# EAGLE board Line follower bot(Tinker CAD) (EAGLE 9.7.0)

Size 232.99 x 148.3 mm. Coordinates in mm from the lower left corner, seen from the top.
Outline: 0,0 232.99,0 232.99,148.3 0,148.3 0,0
Copper layers (1*16): Top 0.035mm / dielectric 1.5mm / Bottom 0.035mm
Design rules "default": minimum track width 6mil, minimum drill 0.35mm, track to track 6mil, track to pad 6mil, pad to pad 6mil, via to via 6mil, smd to smd 6mil, copper to edge 40mil, drill to drill 6mil, minimum pad ring 10mil, minimum via ring 8mil, stop-mask expansion 4mil, vias tented up to drill 0mil, thermal gap 10mil

## Footprints (pad centres in the part's own frame; a part is rotated, then mirrored left to right if it is on the bottom)
BATTERY-GENERIC = drill 1.118 pad 3.15 octagon: + 2.54,0; - -2.54,0
MOTOR = drill 1.118 pad 3.15 octagon: + 2.54,0; - -2.54,0
ARDUINO-UNO-R3-SHIELD = drill 1.016 pad 1.88: 3.3V 24.13,-2.54; 5V 24.13,0; A0 24.13,12.7; A1 24.13,15.24; A2 24.13,17.78; A3 24.13,20.32; A4 24.13,22.86; A5 24.13,25.4; AREF -24.13,-13.97; D2 -24.13,20.32; D3 -24.13,17.78; D4 -24.13,15.24; D5 -24.13,12.7; D6 -24.13,10.16; D7 -24.13,7.62; D8 -24.13,3.81; D9 -24.13,1.27; D10 -24.13,-1.27; D11 -24.13,-3.81; D12 -24.13,-6.35; D13 -24.13,-8.89; GND@0 24.13,2.54; GND@1 24.13,5.08; GND@2 -24.13,-11.43; IOREF 24.13,-7.62; NC 24.13,-10.16; RES 24.13,-5.08; RX -24.13,25.4; SCL -24.13,-19.05; SDA -24.13,-16.51; TX -24.13,22.86; VIN 24.13,7.62
TSOP48 = drill 0.8: 1 -2.54,0; 2 0,0; 3 2.54,0
DIP762W53P254L1969H508Q16B = drill 0.743 pad 1.343: 1 -3.81,8.89; 2 -3.81,6.35; 3 -3.81,3.81; 4 -3.81,1.27; 5 -3.81,-1.27; 6 -3.81,-3.81; 7 -3.81,-6.35; 8 -3.81,-8.89; 9 3.81,-8.89; 10 3.81,-6.35; 11 3.81,-3.81; 12 3.81,-1.27; 13 3.81,1.27; 14 3.81,3.81; 15 3.81,6.35; 16 3.81,8.89

## Placement (x,y rotation side)
BAT1  9V  [BATTERY-GENERIC]  129.29,8.26 270 top
M1  MOTOR_HDR  [MOTOR]  224.73,140.04 0 top
M2  MOTOR_HDR  [MOTOR]  185.32,139.53 0 top
U1  ARDUINO-UNO-R3-SHIELD  [ARDUINO-UNO-R3-SHIELD]  47.88,113.97 270 top
U4  IR-RECEIVERTSOP48  [TSOP48]  36.46,66.98 0 top
U5  IR-RECEIVERTSOP48  [TSOP48]  37.25,53.23 0 top
U6  IR-RECEIVERTSOP48  [TSOP48]  37.25,39.63 0 top
U7  IR-RECEIVERTSOP48  [TSOP48]  38.03,25.51 0 top
U8  IR-RECEIVERTSOP48  [TSOP48]  38.03,11.39 0 top
U9  L293E  [DIP762W53P254L1969H508Q16B]  156.59,54.54 90 top

## Library data of the parts
BAT1 M1 M2 U1 U4-U9 = Tinkercad

## Nets
BAT1+: BAT1.+ U9.8
BAT1-: BAT1.- U1.GND@0 U1.GND@1 U1.GND@2 U4.2 U5.2 U6.2 U7.2 U8.2 U9.4 U9.5 U9.12 U9.13
M1_+: M1.+ U9.14
M1_-: M1.- U9.11
M2_+: M2.+ U9.6
M2_-: M2.- U9.3
U1_5V: U1.5V U4.3 U5.3 U6.3 U7.3 U8.3 U9.16
U1_A0: U1.A0 U4.1
U1_A1: U1.A1 U5.1
U1_A2: U1.A2 U6.1
U1_A3: U1.A3 U7.1
U1_A4: U1.A4 U8.1
U1_D5: U1.D5 U9.1
U1_D6: U1.D6 U9.9
U1_D7: U1.D7 U9.2
U1_D8: U1.D8 U9.7
U1_D9: U1.D9 U9.10
U1_D11: U1.D11 U9.15

## Tracks (layer width: path | path; a pad name or v marks a point on that pad's centre or on a via)
BAT1+  (1 unrouted)
BAT1-  (12 unrouted)
M1_+  (1 unrouted)
M1_-  (1 unrouted)
M2_+  (1 unrouted)
M2_-  (1 unrouted)
U1_5V  (6 unrouted)
U1_A0  (1 unrouted)
U1_A1  (1 unrouted)
U1_A2  (1 unrouted)
U1_A3  (1 unrouted)
U1_A4  (1 unrouted)
U1_D5  (1 unrouted)
U1_D6  (1 unrouted)
U1_D7  (1 unrouted)
U1_D8  (1 unrouted)
U1_D9  (1 unrouted)
U1_D11  (1 unrouted)